# Altium PCB AC_Output.PcbDoc
Units mm, origin at the board's own origin, x right, y up, seen from the top; angles counter-clockwise.
Board outline 166.24 x 105.16 mm, 2 copper layers (Top Layer, Bottom Layer); 30 components, 24 nets, 146 pads, 4 vias.
Unrouted connection lines stored in the file: 3.
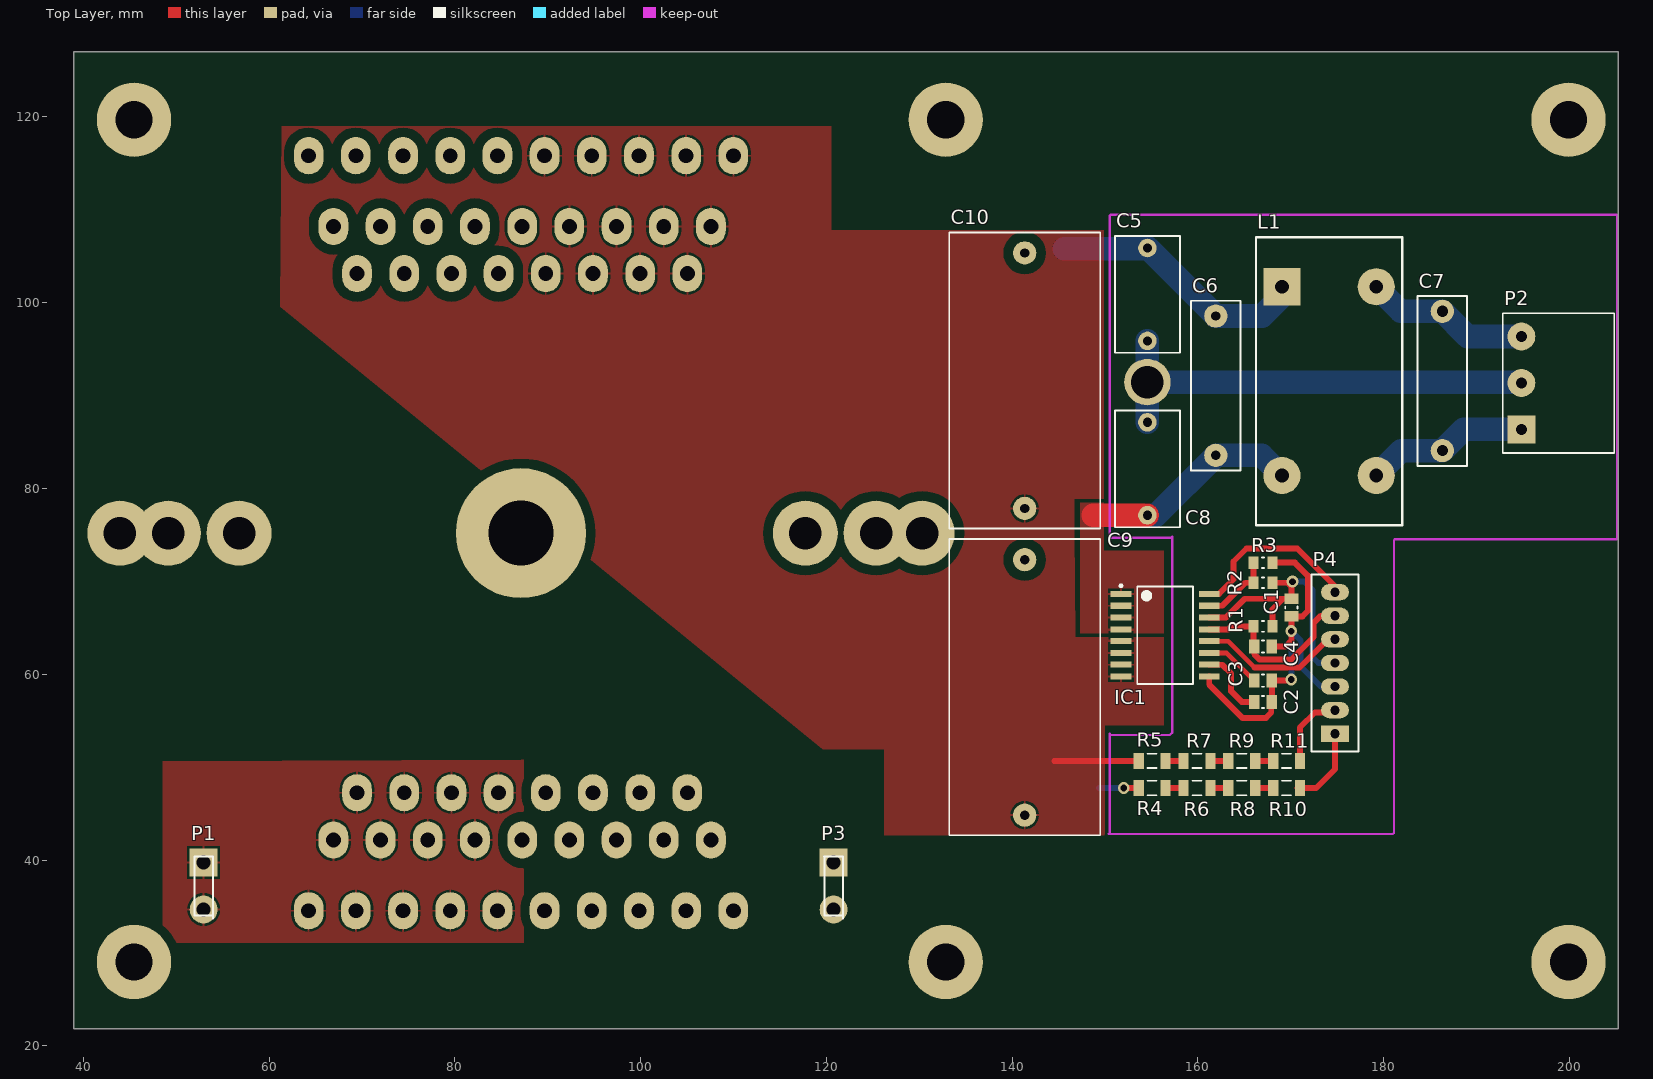
[diagram p0: Top Layer view]
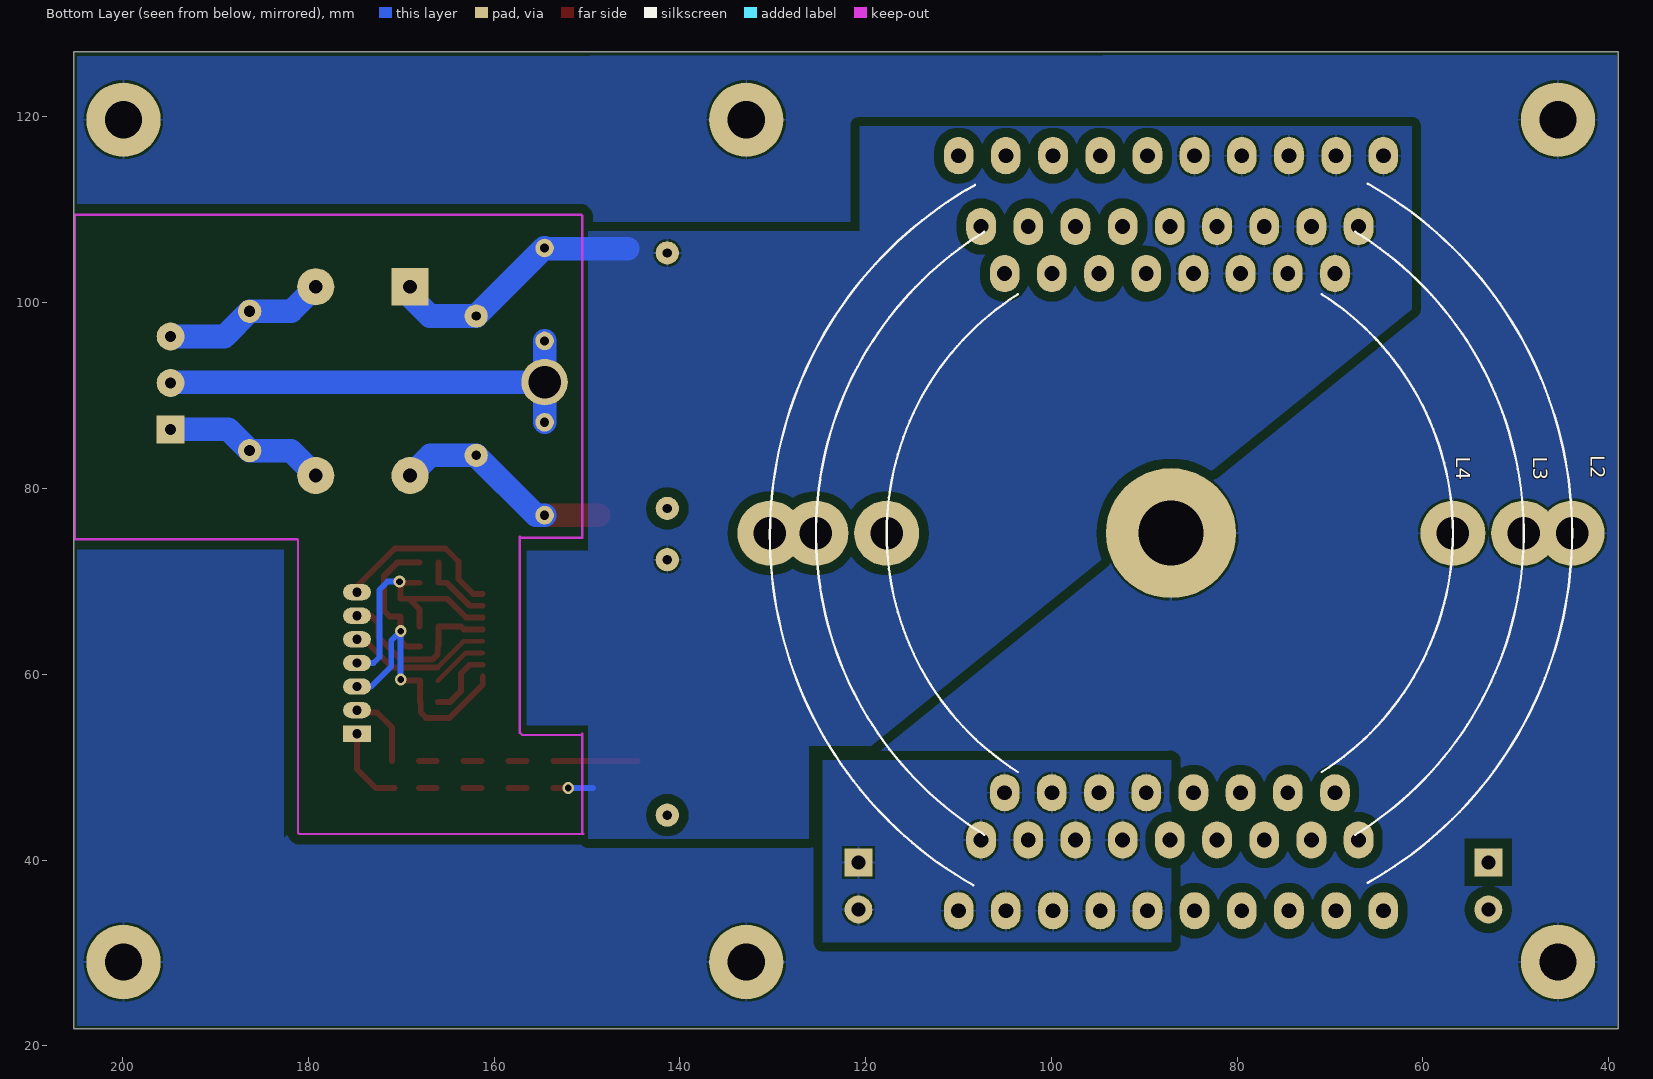
[diagram p1: Bottom Layer view, seen from below]

## Layer stack, top to bottom
Top Solder: solder mask 0.0102, Solder Resist, Dk 3.5
Top Layer: signal copper 0.0356
Dielectric1: dielectric 0.32, FR-4, Dk 4.8
Bottom Layer: signal copper 0.0356
Bottom Solder: solder mask 0.0102, Solder Resist, Dk 3.5

## Board outline
38.989,21.844 38.989,127 205.232,127 205.232,21.844

## Design rules (kind name [scope] priority, off if disabled: settings)
Clearance Clearance_4 [InNet('EARTH')] p1: gap=1.016
Clearance Clearance_3 [InNet('NetL2_16')] p2: gap=1.016
Clearance Clearance_2 [InNet('NetL2_11')] p3: gap=1.016
Clearance Clearance_1 [InNet('NetC5_2') vs InNet('NetC9_1')] p4: gap=1.016
Clearance [All] p5: gap=0.254
PolygonConnect [All] p1: connectstyle=Relief reliefconductorwidth=0.254 reliefentries=4 polygonreliefangle="90 Angle" airgapwidth=0.254
RoomDefinition Main [InComponentClass('Main')] p1: confinementstyle=ConfineIn formatcopy=TRUE lockcomponents=FALSE outline 37.846,27.813 204.089,27.813 204.089,123.571 37.846,123.571
RoomDefinition "Differential Mode Filter" [InComponentClass('Differential Mode Filter')] p2: confinementstyle=ConfineIn formatcopy=TRUE lockcomponents=FALSE outline 38.989,27.559 149.352,27.559 149.352,122.809 38.989,122.809
RoomDefinition "Common Mode Filter" [InComponentClass('Common Mode Filter')] p3: confinementstyle=ConfineIn formatcopy=TRUE lockcomponents=FALSE outline 149.987,75.184 189.992,75.184 189.992,109.22 149.987,109.22
RoomDefinition AC_Current_Voltage_Measurement [InComponentClass('AC_Current_Voltage_Measurement')] p4: confinementstyle=ConfineIn formatcopy=TRUE lockcomponents=FALSE outline 172.593,44.196 172.593,73.279 149.987,73.279 149.987,44.196
RoutingVias [All] p1: holewidth=0.711 width=1.27 viastyle="Through Hole" minholewidth=0.711 minwidth=1.27 maxholewidth=0.711 maxwidth=1.27
SolderMaskExpansion [All] p1: expansion=0.102
Width [All] p1: maxlimit=2.54 minlimit=0.254 preferedwidth=0.508 minimp=50.000000 maximp=50.000000 favimp=50.000000
30 further rules are at their usual default settings.

## Classes and differential pairs
component class Main: P1 P2 P4
component class "Differential Mode Filter": C9 C10 L2 L3 L4
component class "Common Mode Filter": C5 C6 C7 C8 L1
component class AC_Current_Voltage_Measurement: C1 C2 C3 C4 IC1 R1 R2 R3 R4 R5 R6 R7 R8 R9 R10 R11

## Components (designator, comment, footprint, x,y, rotation, side; value= is the part's Value field where it differs from the comment)
C1 "EPCOS C2012X7R1H104K" Chip2PinSM127P600-8N 170.053,67.183 r270 top
C2 "EPCOS B37940K51102J60" Chip2PinSM127P600-8N 167.005,57.023 r180 top
C3 "EPCOS B37940K51102J60" Chip2PinSM127P600-8N 167.005,59.309 r180 top
C4 "EPCOS B37940K51102J60" Chip2PinSM127P600-8N 167.005,62.992 r180 top
C5 "TDK CD12-E2GA222MYNS" "SAFETY Y1 type" 154.559,95.885 r90 top
C6 "EPCOS B32922C3104" "MKP PITCH:15mm SIZE:5mmx18mm"#1 161.925,83.566 r90 top
C7 "EPCOS B32922C3104" "MKP PITCH:15mm SIZE:5mmx18mm"#2 186.309,84.074 r90 top
C8 "TDK CD12-E2GA222MYNS" "SAFETY Y1 type" 154.559,87.122 r270 top
C9 "EPCOS B32794D2106" "MKP AC filtering - 10" 141.351,44.831 r90 top
C10 "EPCOS B32794D2106" "MKP AC filtering - 10" 141.351,77.851 r90 top
IC1 "ACS710" "AC710 - SOIC127P600-8N" 156.464,64.201 r0 top
L1 "Coupled Inductors" "Bourns 8108-RC" 179.197,101.713 r270 top
L2 "Coupled Inductors" Core_PM_87/70 87.122,75.184 r270 bottom
L3 "Coupled Inductors" Core_PM_74/59 66.929,108.204 r270 bottom
L4 "Coupled Inductors" Core_PM_62/49 87.249,75.184 r270 bottom
P1 "Faston 5mm PCB" "FASTON 5mm PCB" 52.959,37.211 r270 top
P2 "XY2500R-A-3P" XY2500R-A-3P 194.818,86.36 r90 top
P3 "Faston 5mm PCB" "FASTON 5mm PCB" 120.777,37.211 r270 top
P4 "WF-7" HDR1X7 174.752,53.594 r90 top
R1 "Resistor SMD 0805" "Chip2PinSM127P600-8N - 0805" 167.005,65.151 r180 top
R2 "Resistor SMD 0805" "Chip2PinSM127P600-8N - 0805" 167.005,69.85 r180 top
R3 "Resistor SMD 0805" "Chip2PinSM127P600-8N - 0805" 167.005,72.009 r0 top
R4 "Resistor SMD 1206" "RESC3116X07N - 1206" 155.067,47.752 r180 top
R5 "Resistor SMD 1206" "RESC3116X07N - 1206" 155.067,50.673 r180 top
R6 "Resistor SMD 1206" "RESC3116X07N - 1206" 159.893,47.752 r180 top
R7 "Resistor SMD 1206" "RESC3116X07N - 1206" 159.893,50.673 r180 top
R8 "Resistor SMD 1206" "RESC3116X07N - 1206" 164.719,47.752 r180 top
R9 "Resistor SMD 1206" "RESC3116X07N - 1206" 164.719,50.673 r180 top
R10 "Resistor SMD 1206" "RESC3116X07N - 1206" 169.545,47.752 r180 top
R11 "Resistor SMD 1206" "RESC3116X07N - 1206" 169.545,50.673 r180 top

## Footprints (in the part's own frame and the unit in brackets; to place one, negate y for a bottom-side part, rotate by r counter-clockwise, add the part's x,y. Pads: shape width x height; smd on the part's side, far side on the other; paste and mask are expansions set on the pad)
"AC710 - SOIC127P600-8N" [mm] "SOIC127P600-8N"
  rect 2.25x0.65 smd: 1(-4.75,4.445) 2(-4.75,3.175) 3(-4.75,1.905) 4(-4.75,0.635) 5(-4.75,-0.635) 6(-4.75,-1.905) 7(-4.75,-3.175) 8(-4.75,-4.445) 9(4.75,-4.445) 10(4.75,-3.175) 11(4.75,-1.905) 12(4.75,-0.635) 13(4.75,0.635) 14(4.75,1.905) 15(4.75,3.175) 16(4.75,4.445)
  silkscreen extent -4.87,-5.25 3,5.44, body extent -3.8,-5.25 3.8,5.25, height 2.65
"Bourns 8108-RC" [mm] "Common mode inductor 10A 1mH"
  rect 4x4 hole 1.5: 1(0,-10.16)
  round 4 hole 1.5: 2(0,0) 3(20.32,0) 4(20.32,-10.16)
  silkscreen extent -5.33,-12.95 25.65,2.79
Chip2PinSM127P600-8N [mm] "SMD 0805"
  rect 1.15x1.5 smd: 1(-0.95,0) 2(0.95,0)
  silkscreen extent -0.1,-0.65 0.1,0.65, body extent -1.1,-0.72 1.1,0.72, height 0.95
"Chip2PinSM127P600-8N - 0805" [mm] "SMD 0805"
  rect 1.05x1.35 smd: 1(-1.025,0) 2(1.025,0)
  silkscreen extent -0.1,-0.58 0.1,0.58, body extent -1.08,-0.7 1.08,0.7, height 0.64
Core_PM_62/49 [mm] "PM core 62/49"
  round 9 hole 4.5: 0(0,0)
  oval 4x3.2 hole 1.6: 1(-27.94,17.78) 2(-27.94,12.7) 3(-27.94,7.62) 4(-27.94,2.54) 5(-27.94,-2.54) 6(-27.94,-7.62) 7(-27.94,-12.7) 8(-27.94,-17.78) 9(27.94,-17.78) 10(27.94,-12.7) 11(27.94,-7.62) 12(27.94,-2.54) 13(27.94,2.54) 14(27.94,7.62) 15(27.94,12.7) 16(27.94,17.78)
  round 7 hole 3.5: 17(0,-30.48) 18(0,30.48)
  silkscreen extent -25.71,-30.48 25.71,30.48
Core_PM_74/59 [mm] "PM core 74/59"
  round 9 hole 4.5: 0(33.02,-20.32)
  oval 4x3.2 hole 1.6: 1(0,0) 2(0,-5.08) 3(0,-10.16) 4(0,-15.24) 5(0,-20.32) 6(0,-25.4) 7(0,-30.48) 8(0,-35.56) 9(0,-40.64) 10(66.04,-40.64) 11(66.04,-35.56) 12(66.04,-30.48) 13(66.04,-25.4) 14(66.04,-20.32) 15(66.04,-15.24) 16(66.04,-10.16) 17(66.04,-5.08) 18(66.04,0)
  round 7 hole 3.5: 19(33.02,17.78) 20(33.02,-58.42)
  silkscreen extent 0.57,-58.42 65.47,17.78
Core_PM_87/70 [mm] "PM core 87/70"
  round 14 hole 7: 0(0,0)
  oval 4x3.2 hole 1.6: 1(-40.64,22.86) 2(-40.64,17.78) 3(-40.64,12.7) 4(-40.64,7.62) 5(-40.64,2.54) 6(-40.64,-2.54) 7(-40.64,-7.62) 8(-40.64,-12.7) 9(-40.64,-17.78) 10(-40.64,-22.86) 11(40.64,-22.86) 12(40.64,-17.78) 13(40.64,-12.7) 14(40.64,-7.62) 15(40.64,-2.54) 16(40.64,2.54) 17(40.64,7.62) 18(40.64,12.7) 19(40.64,17.78) 20(40.64,22.86)
  round 7 hole 3.5: 21(0,-43.18) 22(0,43.18)
  silkscreen extent -37.63,-43.18 37.89,43.18
"FASTON 5mm PCB" [mm] "FASTON 5mm PCB"
  rect 3x3 hole 1.5: 1(-2.54,0)
  round 3 hole 1.5: 1(2.54,0)
  silkscreen extent -3.18,-1.02 3.5,1.02
HDR1X7 [mm] "Connector; Header; 7 Position; Pitch 2.54mm"
  rect 1.75x3 hole 1: 1(0,0)
  oval 1.75x3 hole 1: 2(2.54,0) 3(5.08,0) 4(7.62,0) 5(10.16,0) 6(12.7,0) 7(15.24,0)
  silkscreen extent -1.91,-2.54 17.14,2.54
"MKP AC filtering - 10" [mm] "Pitch: 27.5 mm w: 16mm h:32mm l:31.5mm"
  round 2.5 hole 1: 1(0,0) 2(27.5,0)
  silkscreen extent -2.16,-8.13 29.72,8.13
"MKP PITCH:15mm SIZE:5mmx18mm"#1 [mm] "Pitch: 15 mm w: 5mm h:10.5mm l:18mm"
  round 2.5 hole 1: 1(0,0) 2(15,0)
  silkscreen extent -1.65,-2.67 16.64,2.67
"MKP PITCH:15mm SIZE:5mmx18mm"#2 [mm] "Pitch: 15 mm w: 5mm h:10.5mm l:18mm"
  round 2.5 hole 1.2: 1(0,0) 2(15,0)
  silkscreen extent -1.65,-2.67 16.64,2.67
"RESC3116X07N - 1206" [mm] "Chip Resistor, 2-Leads, Body 3,05x1,60mm, IPC Medium Density"
  rect 1.1x1.75 smd: 1(-1.45,0) 2(1.45,0)
  silkscreen extent -0.5,-0.77 0.5,0.77, body extent -1.55,-0.85 1.55,0.85, height 0.65
"SAFETY Y1 type" [mm] "Pitch 10mm 7 x 12mm"
  round 2 hole 1: 1(0,0) 2(10,0)
  silkscreen extent -1.27,-3.5 11.3,3.5
XY2500R-A-3P [mm] "HEADER 3P 90gra P/CI P=5MM"
  rect 3x3 hole 1.2: 1(0,0)
  round 3 hole 1.2: 2(5,0) 3(10,0)
  silkscreen extent -2.54,-10 12.5,2

## Part data
C1: "Ceramic Multilayer 100nF 50Vdc"
C2 C3 C4: "Ceramic Multilayer 1nF 50Vdc COG"
C5 C8: "Safety Standard Certified Ceramic Y1 2.2nF 250Vac"
C6 C7: "MKP EMI suppression X2 100nF 305Vac"
C9 C10: "MKP AC Filtering 10uF 630Vdc"
IC1: "Hall Effect Current Sensor"
L1: library part "Common mode filter 10A", "Common mode filter"
L2: library part "Inductor 87/70", "Coupled Inductors with Ferrite core and Air gap"
L3: library part "Inductor 74/59", "Coupled Inductors with Ferrite core and Air gap"
L4: library part "Inductor 62/49", "Coupled Inductors with Ferrite core and Air gap"
P2: "HEADER 3P 90gra P/CI P=5MM"
P4: library part "Header 7", "Header, 7-Pin, 2.54mm pitch"

## Free pads (board coordinates)
  round 8 hole 4: 0(45.466,29.019) 1(199.898,29.019) 2(199.898,119.697) 3(45.466,119.697) 3(132.842,29.019) 3(132.842,119.697)
  round 5 hole 3.5: 2(154.559,91.44)

## Via types
v1: diameter 1.27, hole 0.711, Top Layer to Bottom Layer, 4 vias

## Nets (pads, with @x,y where several pads share a name; then routed paths per layer and width w, separated by ;. In a path a pad name is that pad's centre, name@x,y a point inside that pad or via, vN(x,y) a via of type N, cw(c..) or ccw(c..) an arc to the next point about the centre after c; other vN are vias at no path point)
5V: C1.1 IC1.14 P4.4 R1.1 R2.1 | length 29.1
  Top Layer w0.635: IC1.14 163.007,66.106 165.034,68.133 169.164,68.133 ; R1.1 168.03,66.999 169.164,68.133 ; R2.1 169.672,69.85 170.053,69.469 C1.1 169.164,68.133
  Bottom Layer w0.635: v1(170.18,69.977) 171.45,69.977 172.339,69.088 172.339,61.849 172.974,61.214 P4.4
EARTH: C5.1 C8.1 L2.0 L2.21 L2.22 L3.0 L3.19 L3.20 L4.0 L4.17 L4.18 P2.2 pad.0 pad.1 pad.2 pad.3 | length 48.9
  Bottom Layer w2.54: C8.1 pad.2@154.559,91.44 ; C5.1 pad.2@154.559,91.44 ; P2.2@194.738,91.44 pad.2@154.559,91.44
NetC2_2: C2.2 IC1.10 | length 7.6
  Top Layer w0.635: IC1.10 162.621,61.026 163.576,60.071 163.576,58.166 164.719,57.023 C2.2
NetC3_2: C3.2 IC1.11 | length 6.1
  Top Layer w0.508: IC1.11 163.068,62.296 C3.2
NetC4_2: C4.2 IC1.13 P4.6 R1.2 | length 19.6
  Top Layer w0.635: IC1.13 163.261,64.836 163.576,65.151 R1.2 C4.2@165.98,63.067 ; C4.2 166.055,62.164 166.612,61.607 170.065,61.607 172.466,64.008 172.466,65.532 173.228,66.294 P4.6
NetC5_2: C5.2 C6.2 C9.2 C10.2 L1.1 L2.1 L2.2 L2.3 L2.4 L2.5 L3.1 L3.2 L3.3 L3.4 L4.1 L4.2 L4.3 L4.4 R4.2 | length 32.4
  Top Layer w0.635: v1(152.019,47.752) R4.2
  Bottom Layer w0.635: 149.352,47.752 151.638,47.752 v1@151.765,47.625
  Bottom Layer w2.54: 145.596,105.805 C5.2@154.559,105.805 ; C5.2 154.606,105.885 C6.2 166.892,98.566 169.037,100.711 L1.1
NetC6_1: C6.1 C8.2 IC1.1 IC1.2 IC1.3 IC1.4 L1.4 | length 23.9
  Top Layer w2.54: 148.717,77.122 C8.2
  Bottom Layer w2.54: C8.2 155.481,77.122 C6.1 166.864,83.566 L1.4
NetC7_1: C7.1 L1.3 P2.1 | length 17.7
  Bottom Layer w2.54: L1.3 181.878,84.074 C7.1 188.595,86.36 P2.1
NetC7_2: C7.2 L1.2 P2.3 | length 17.8
  Bottom Layer w2.54: L1.2 181.836,99.074 C7.2 189.023,96.36 P2.3
NetC9_1: C9.1 C10.1 IC1.5 IC1.6 IC1.7 IC1.8 L2.6 L2.7 L2.8 L2.9 L2.10 L3.6 L3.7 L3.8 L3.9 L4.5 L4.6 L4.7 L4.8 R5.2 | length 9.1
  Top Layer w0.635: 144.526,50.673 R5.2
NetIC1_12: IC1.12 P4.5 | length 16
  Top Layer w0.508: IC1.12 163.258,63.566 166.106,60.718
  Top Layer w0.635: 166.106,60.718 170.954,60.718 173.99,63.754 P4.5
NetIC1_15: IC1.15 R2.2 R3.1 | length 7.9
  Top Layer w0.635: IC1.15 162.626,67.376 165.1,69.85 R2.2 R3.1
NetIC1_16: IC1.16 P4.7 | length 19
  Top Layer w0.635: IC1.16 162.245,68.646 163.83,70.231 163.83,72.136 165.227,73.533 170.688,73.533 174.752,69.469 P4.7
NetL2_11: L2.11 L2.12 L2.13 L2.14 L2.15 L3.10 L3.11 L3.12 L3.13 L4.9 L4.10 L4.11 L4.12 P3.1
NetL2_16: L2.16 L2.17 L2.18 L2.19 L2.20 L3.15 L3.16 L3.17 L3.18 L4.13 L4.14 L4.15 L4.16 P1.1
NetP4_1: P4.1 R10.1 | length 8.7
  Top Layer w0.635: R10.1@170.688,47.752 172.72,47.752 174.752,49.784 P4.1
NetP4_2: P4.2 R11.1 | length 8.1
  Top Layer w0.635: R11.1 170.995,54.282 172.593,55.88 174.498,55.88 P4.2
NetR4_1: R4.1 R6.2 | length 1.9
  Top Layer w0.635: R4.1 R6.2
NetR5_1: R5.1 R7.2 | length 1.9
  Top Layer w0.635: R5.1 R7.2
NetR6_1: R6.1 R8.2 | length 1.9
  Top Layer w0.635: R6.1 R8.2
NetR7_1: R7.1 R9.2 | length 1.9
  Top Layer w0.635: R7.1 R9.2
NetR8_1: R8.1 R10.2 | length 1.9
  Top Layer w0.635: R8.1 R10.2
NetR9_1: R9.1 R11.2 | length 1.9
  Top Layer w0.635: R9.1 R11.2
SGND: C1.2 C2.1 C3.1 C4.1 IC1.9 P4.3 R3.2 | length 44
  Top Layer w0.635: IC1.9 161.214,58.877 164.782,55.308 167.322,55.308 167.894,55.88 C2.1@167.894,56.962 ; C2.1 C3.1 169.926,59.309 v1(170.053,59.436) ; C4.1 169.418,62.992 170.053,63.627 v1(170.053,64.643) C1.2 171.262,66.233 171.831,66.802 171.831,70.612 170.434,72.009 R3.2
  Bottom Layer w0.635: v1(170.053,59.436) v1(170.053,64.643) 171.069,63.627 171.069,60.833 173.228,58.674 P4.3
pads on no net: L3.5 L3.14

## Polygon pours and split planes (outlines as drawn)
NetL2_16 on Top Layer "Top Layer-No Net" (solid, remove dead copper, pour order 10): 48.538,31.091 48.538,50.649 87.146,50.776 87.4,50.776 87.4,31.091
NetC6_1 on Top Layer "Top Layer-No Net" (solid, remove dead copper, pour order 2): 156.337,64.389 156.337,73.279 149.86,73.279 149.86,78.486 147.32,78.486 147.32,64.389
NetC9_1 on Top Layer "Top Layer-No Net" (solid, remove dead copper, pour order 4): 156.337,64.008 156.337,54.483 149.987,54.483 149.987,42.672 126.238,42.672 126.238,51.943 119.634,51.943 61.214,99.568 61.341,118.999 120.523,118.999 120.523,107.823 149.86,107.823 149.86,78.867 146.685,78.867 146.685,75.438 146.812,64.008
NetC5_2 on Bottom Layer "Top Layer-No Net" (solid, remove dead copper, pour order 8): 61.214,99.314 119.38,52.324 126.111,52.324 126.111,42.291 149.86,42.291 149.86,54.483 156.464,54.483 156.464,73.279 149.86,73.279 149.86,107.696 120.65,107.696 120.65,118.999 61.214,118.999
EARTH on Bottom Layer "Top Layer-No Net" (solid, remove dead copper, pour order 16): 39.116,22.162 204.851,22.162 204.851,74.486 182.614,74.486 182.614,42.355 182.253,42.735 153.394,42.735 153.394,53.276 153.153,53.53 153.514,53.911 160.729,53.911 160.729,74.867 160.969,75.12 160.849,75.248 153.875,75.248 153.875,108.902 153.634,109.156 204.851,109.41 204.851,126.555 39.116,126.682
NetL2_11 on Bottom Layer "Top Layer-No Net" (solid, remove dead copper, pour order 12): 87.073,31.144 87.073,50.829 87.258,50.753 124.587,50.753 124.587,31.144

## Keep-outs
Keep-Out Layer:
  lines w0.254: 150.368,42.799 150.495,42.926 150.495,53.594 150.622,53.467 156.972,53.467 157.226,53.721 157.226,74.803 157.099,74.676 150.495,74.676 150.495,109.347 150.622,109.474 205.105,109.474 205.105,74.549 181.229,74.549 181.102,74.422 181.102,42.926 180.975,42.799 150.368,42.799

## Silkscreen, mask and mechanical layers (free items; w line width, h text height)
Mechanical 1:
  lines w0.254: 126.238,97.917 136.238,97.917